# Altium PCB PCB Placa Base Blue Pill.PcbDoc
Units mil, origin at the board's own origin, x right, y up, seen from the top; angles counter-clockwise.
Board outline 6000 x 4000 mil, 2 copper layers (Top Layer, Bottom Layer); 15 components, 6 nets, 91 pads, 0 vias.
Unrouted connection lines stored in the file: 21.
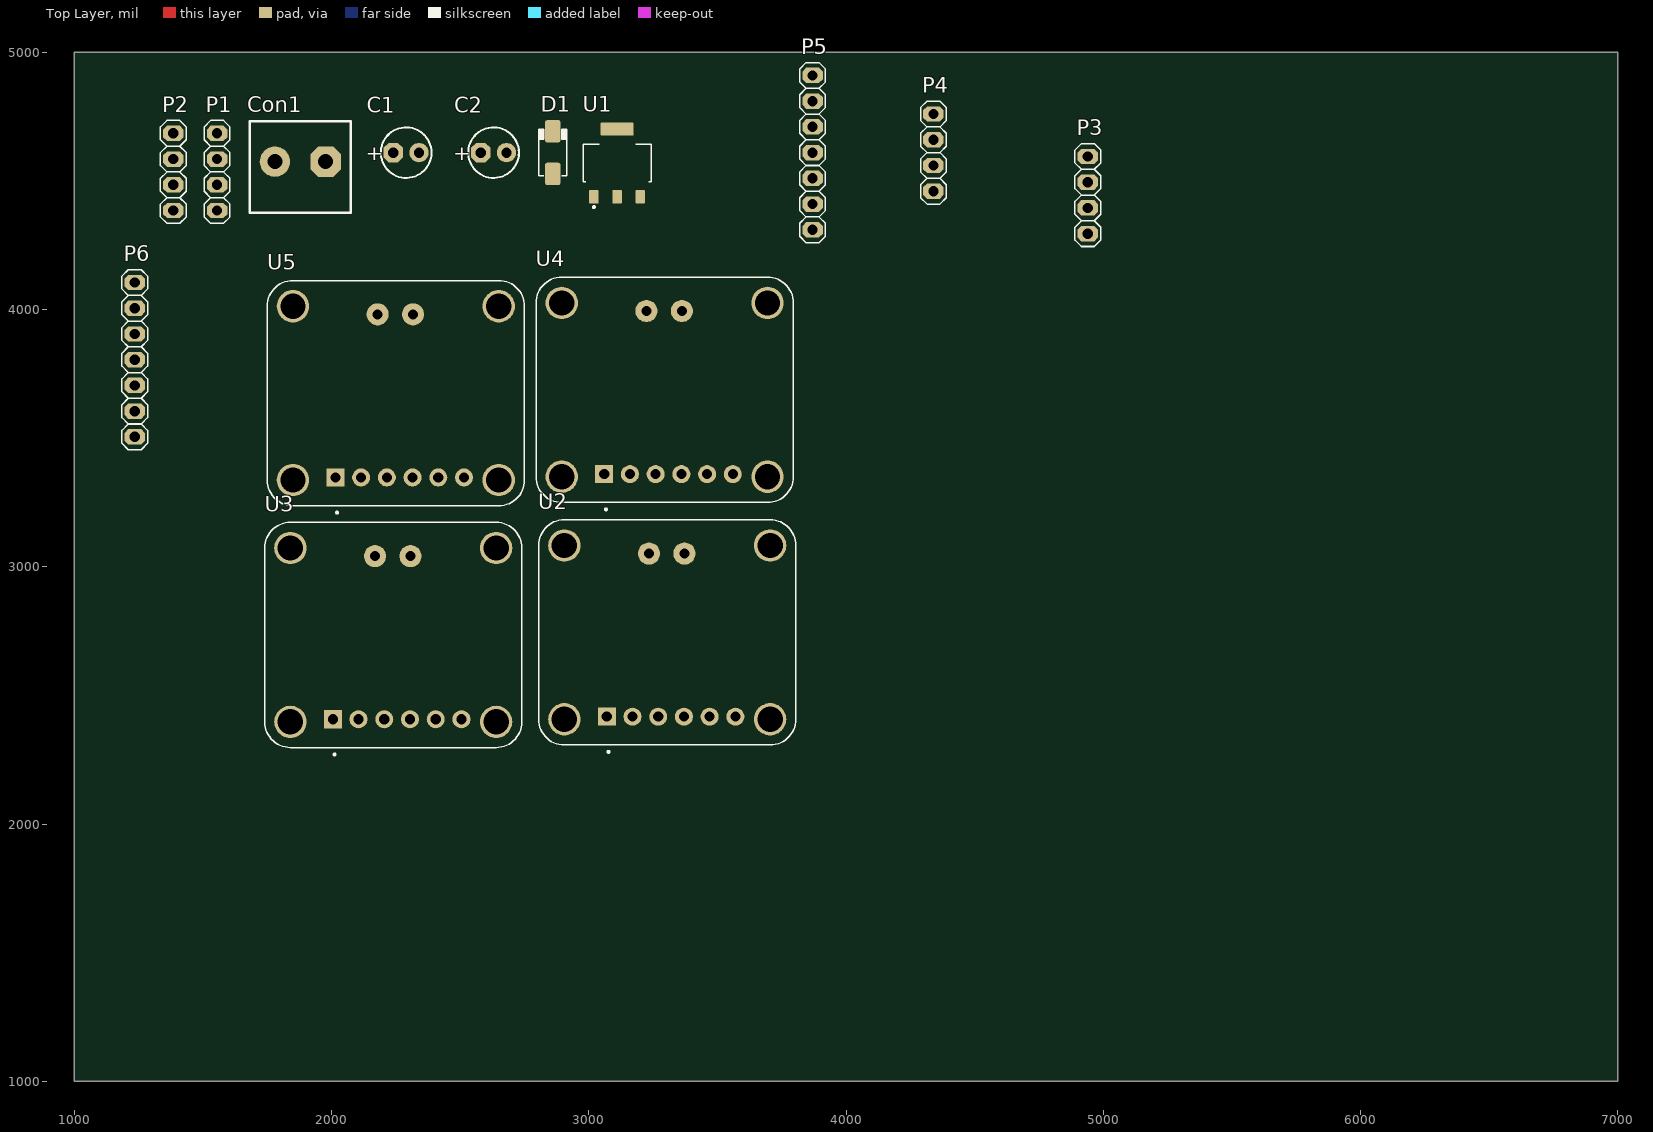
[diagram p0: Top Layer view]
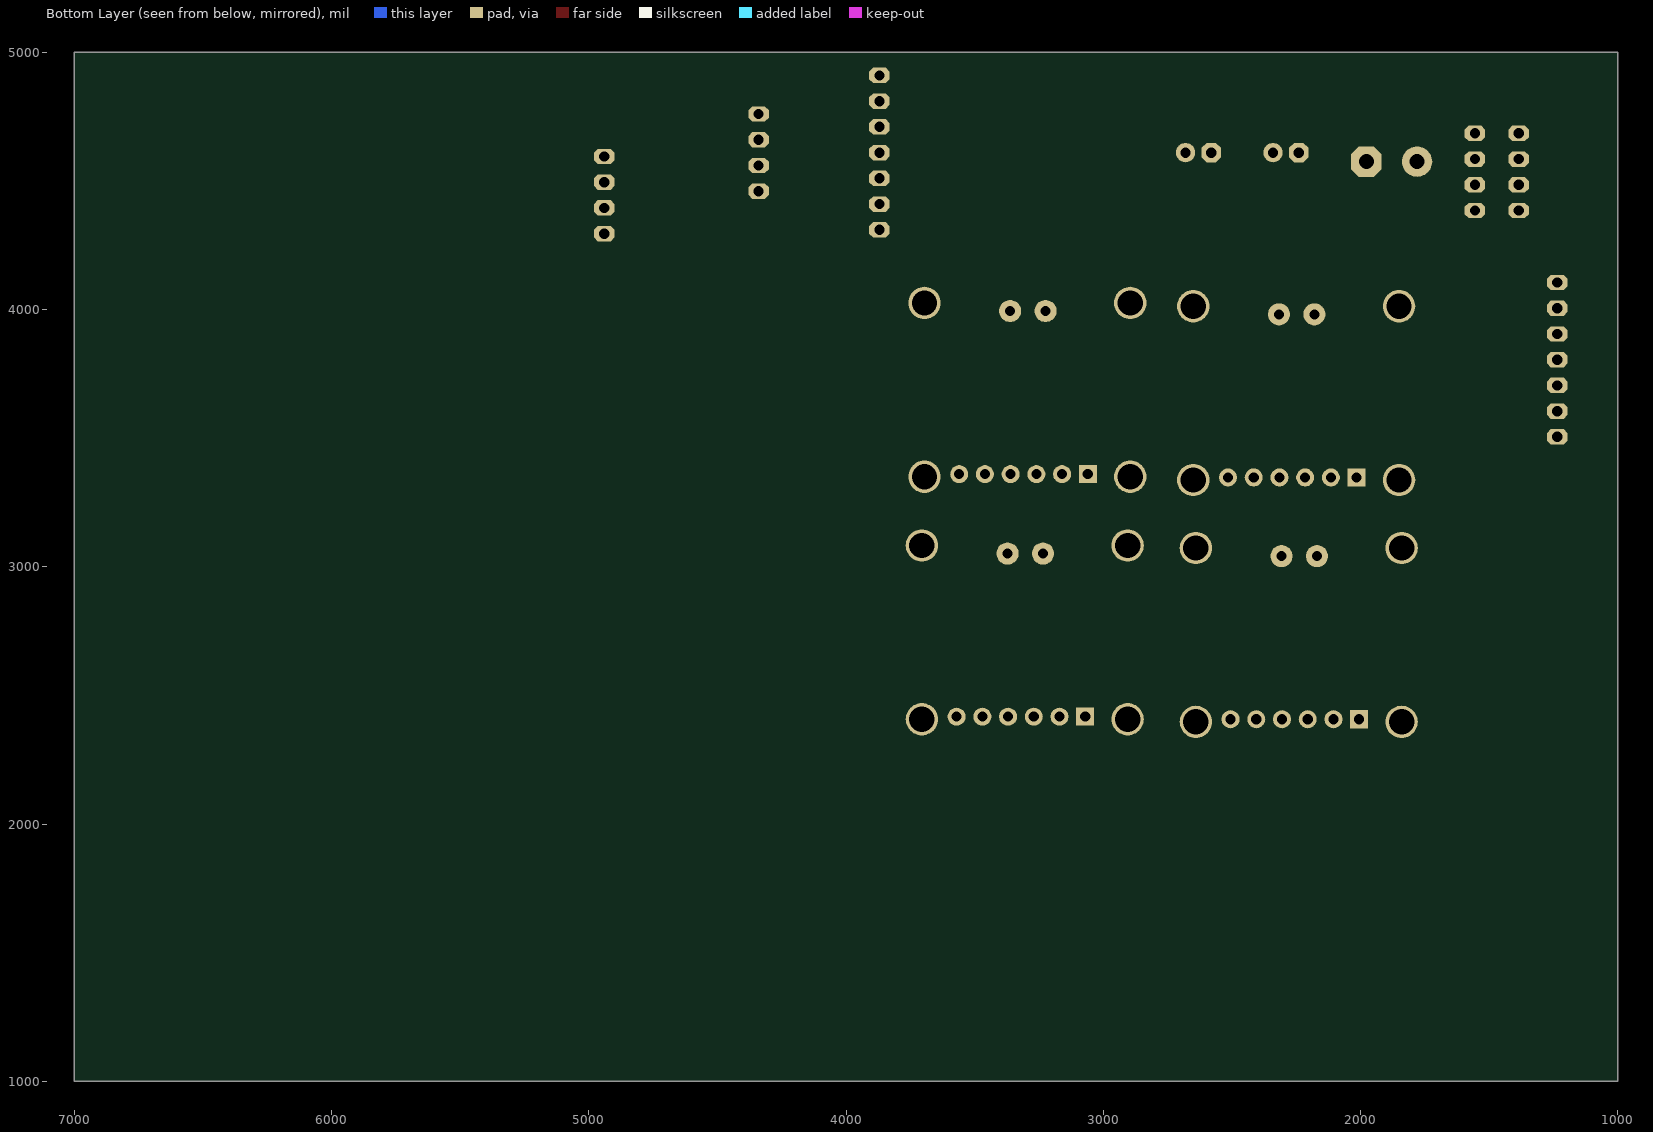
[diagram p1: Bottom Layer view, seen from below]

## Layer stack, top to bottom
Top Solder: solder mask 0.4, Solder Resist, Dk 3.5
Top Layer: signal copper 1.4
Dielectric 1: dielectric 12.6, FR-4, Dk 4.8
Bottom Layer: signal copper 1.4
Bottom Solder: solder mask 0.4, Solder Resist, Dk 3.5

## Board outline
1000,1000 7000,1000 7000,5000 1000,5000

## Design rules (kind name [scope] priority, off if disabled: settings)
Clearance [All] p1: gap=10 ignorepadtopadclearanceinfootprint=FALSE except(0: Arc-Hole Track-Hole SMDPad-Hole THPad-Hole Via-Hole Fill-Hole Poly-Hole Region-Hole Text-Hole)
PolygonConnect [All] p1: connectstyle=Relief reliefconductorwidth=10 reliefentries=4 polygonreliefangle="90 Angle" airgapwidth=10
RoutingVias [All] p1: holewidth=28 width=50 viastyle="Through Hole" minholewidth=28 minwidth=50 maxholewidth=28 maxwidth=50
SolderMaskExpansion [All] p1: expansion=4
Width [All] p1: maxlimit=10 minlimit=10 preferedwidth=10
30 further rules are at their usual default settings.

## Components (designator, comment, footprint, x,y, rotation, side; value= is the part's Value field where it differs from the comment)
C1 "CAP- ELECT" "CAPRADIAL 6.3X11 - 10u" 2290,4610 r0 top value=10uF
C2 "CAP- ELECT" "CAPRADIAL 6.3X11 - 10u" 2630,4610 r0 top value=10uF
Con1 "CON2 pin blue" "BORNE 2P" 1780,4575 r0 top
D1 "1N4007" DO-214AC 2860,4610 r90 top
P1 "Header 4" 1X04 1555,4535 r90 top
P2 "Header 4" 1X04 1385,4535 r90 top
P3 "Header 4" 1X04 4940,4445 r90 top
P4 "Header 4" 1X04 4340,4610 r90 top
P5 "Header 7" 1x07 3870,4610 r90 top
P6 "Header 7" 1x07 1235,3805 r90 top
U1 "AMS1117-3.3" SOT229P700X180-4N 3110,4570 r0 top
U2 "904" MODULE_904 3305,2745 r0 top
U3 "904" MODULE_904 2240,2735 r0 top
U4 "904" MODULE_904 3295,3687.8 r0 top
U5 "904" MODULE_904 2250,3675 r0 top

## Footprints (in the part's own frame and the unit in brackets; to place one, negate y for a bottom-side part, rotate by r counter-clockwise, add the part's x,y. Pads: shape width x height; smd on the part's side, far side on the other; paste and mask are expansions set on the pad)
1X04 [mil]
  oct 60x80 hole 40: 1(-150,0) 2(-50,0) 3(50,0) 4(150,0)
  silkscreen extent -200,-50 200,50, body extent -200,-49 200,49, height 344
1x07 [mil]
  oct 60x80 hole 40: 1(-300,0) 2(-200,0) 3(-100,0) 4(0,0) 5(100,0) 6(200,0) 7(300,0)
  silkscreen extent -350,-50 350,50, body extent -350,-49 350,49, height 344
"BORNE 2P" [mm] "Bornera doble"
  oct 3x3 hole 1.5: 1(5,0)
  round 3 hole 1.5: 2(0,0)
  silkscreen extent -2.5,-5.05 7.5,4, body extent -3,-5 7.5,4, height 12.5
"CAPRADIAL 6.3X11 - 10u" [mil] "Capacitor, Electrolytic, Radial; Body 5 x 6.8 mm (Dia.xH typ); Pin Spacing 2 mm (typ)"
  oct 75x75 hole 40: 1(-50,0)
  round 75 hole 40: 2(50,0)
  silkscreen extent -98,-98 98,98, body extent -127,-124 123,126, height 454
DO-214AC [mm] "JEDEC DO214 variation AC. SMA"
  round 0.508 on Mech14: 0(0,0)
  rrect25% 2.2x1.5 smd: A(-2.1,0) K(2.1,0)
  silkscreen extent -2.3,-1.4 2.3,1.4, body extent -2.6,-1.3 2.6,1.3, height 2.42
MODULE_904 [mm]
  rect 1.778x1.778 hole 1: 1(-5.969,-8.326)
  round 1.778 hole 1: 2(-3.429,-8.326) 3(-0.889,-8.326) 4(1.651,-8.326) 5(4.191,-8.326) 6(6.731,-8.326)
  round 3.2 hole 2.5: P1(-10.16,8.58) P2(10.16,8.58) P3(10.16,-8.58) P4(-10.16,-8.58)
  round 2.184 hole 1: VIN+(1.7,7.78) VIN-(-1.8,7.78)
  silkscreen extent -12.7,-11.9 12.7,11.12
SOT229P700X180-4N [mm]
  rrect15% 0.93x1.31 smd: 1(-2.29,-3.345) 2(0,-3.345) 3(2.29,-3.345)
  rrect15% 3.24x1.31 smd: 4(0,3.345)
  silkscreen extent -3.36,-4.47 3.36,1.86, body extent -3.5,-3.25 3.5,3.25, height 0.97

## Part data
C1 C2: library part "Capacitor Electrolitico", "CAP_AXIAL"
Con1: "Connector blue screw"
D1: "1 Amp Diode"
P1 P2 P3 P4: "Header, 4-Pin", LatestRevisionDate=17-Jul-2002, LatestRevisionNote="Re-released for DXP Platform.", Publisher="Altium Limited"
P5 P6: "Header, 7-Pin, 2.54"
U1: "Sot223/Pkg 1-Amp 3.3-Volt Low Drop Out Voltage Regulatator", Package=None, Availability=Unavailable, MF="{'manufacturer': u'NEC'}", MP=AMS1117-3.3, Price=None
U2 U3 U4 U5: "INA219B Current Monitor Power Management Evaluation Board", Package=None, Availability=Unavailable, MF="{'manufacturer': u'Adafruit Industries'}", MP=904, Price=None

## Nets (pads, with @x,y where several pads share a name; then routed paths per layer and width w, separated by ;. In a path a pad name is that pad's centre, name@x,y a point inside that pad or via, vN(x,y) a via of type N, cw(c..) or ccw(c..) an arc to the next point about the centre after c; other vN are vias at no path point)
3V3: C2.1 U1.2 U2.1 U3.1 U4.1 U5.1
GND: C1.2 C2.2 Con1.2 U1.1 U2.2 U3.2 U4.2 U5.2
NetC1_1: C1.1 D1.K U1.3
NetCon1_1: Con1.1 D1.A
SCL: U2.3 U3.3 U4.3 U5.3
SDA: U2.4 U3.4 U4.4 U5.4
pads on no net: D1.0 P1.1 P1.2 P1.3 P1.4 P2.1 P2.2 P2.3 P2.4 P3.1 P3.2 P3.3 P3.4 P4.1 P4.2 P4.3 P4.4 P5.1 P5.2 P5.3 P5.4 P5.5 P5.6 P5.7 P6.1 P6.2 P6.3 P6.4 P6.5 P6.6 P6.7 U1.4 U2.5 U2.6 U2.P1 U2.P2 U2.P3 U2.P4 U2.VIN+ U2.VIN- U3.5 U3.6 U3.P1 U3.P2 U3.P3 U3.P4 U3.VIN+ U3.VIN- U4.5 U4.6 U4.P1 U4.P2 U4.P3 U4.P4 U4.VIN+ U4.VIN- U5.5 U5.6 U5.P1 U5.P2 U5.P3 U5.P4 U5.VIN+ U5.VIN-

## Text inside footprints (layer, text, board x,y; h text height)
C1: Top Overlay "+" at 2133.5,4580.47 h59.06
C2: Top Overlay "+" at 2473.5,4580.47 h59.06